# EAGLE board CoffeeHeater (EAGLE 9.2.0)
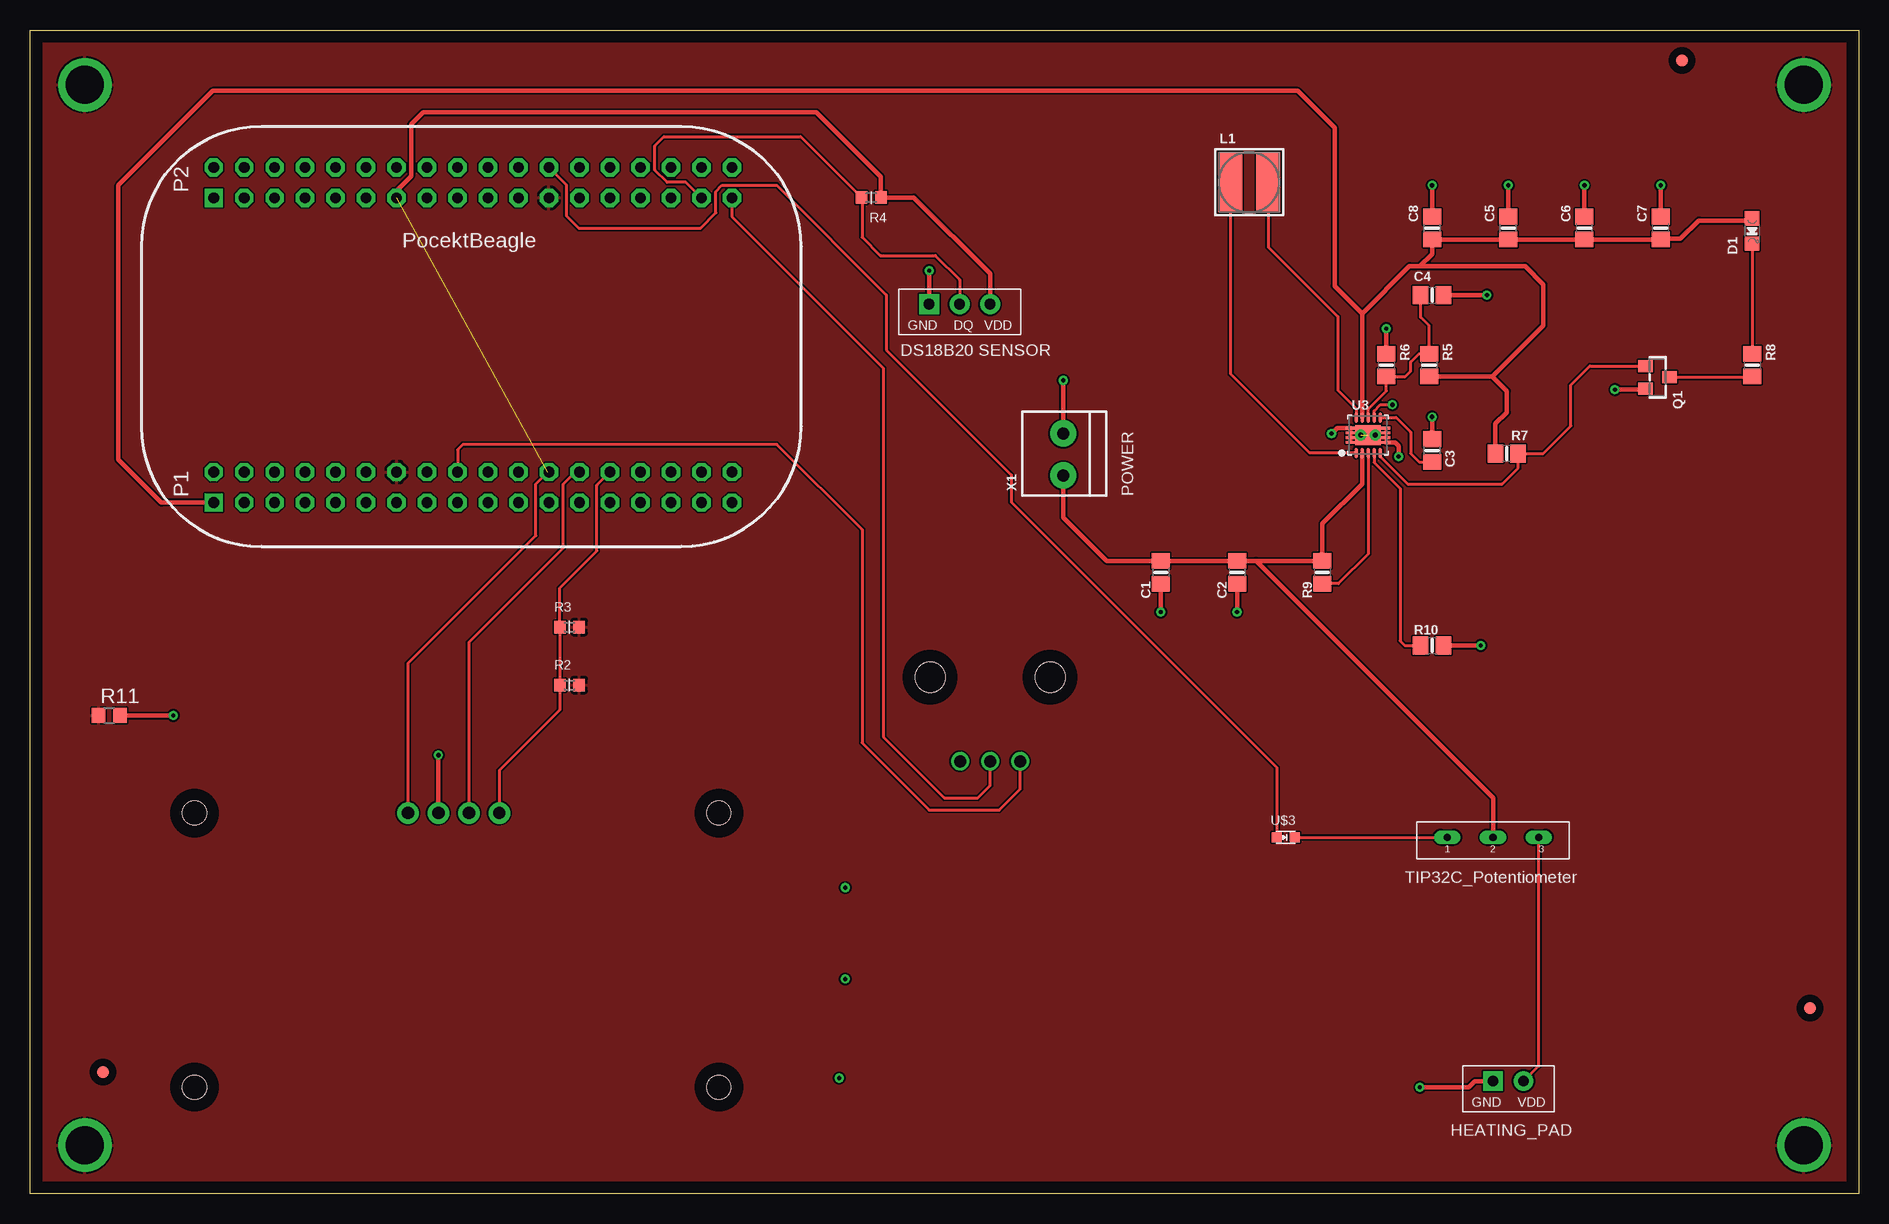
[diagram p0: board, top side]
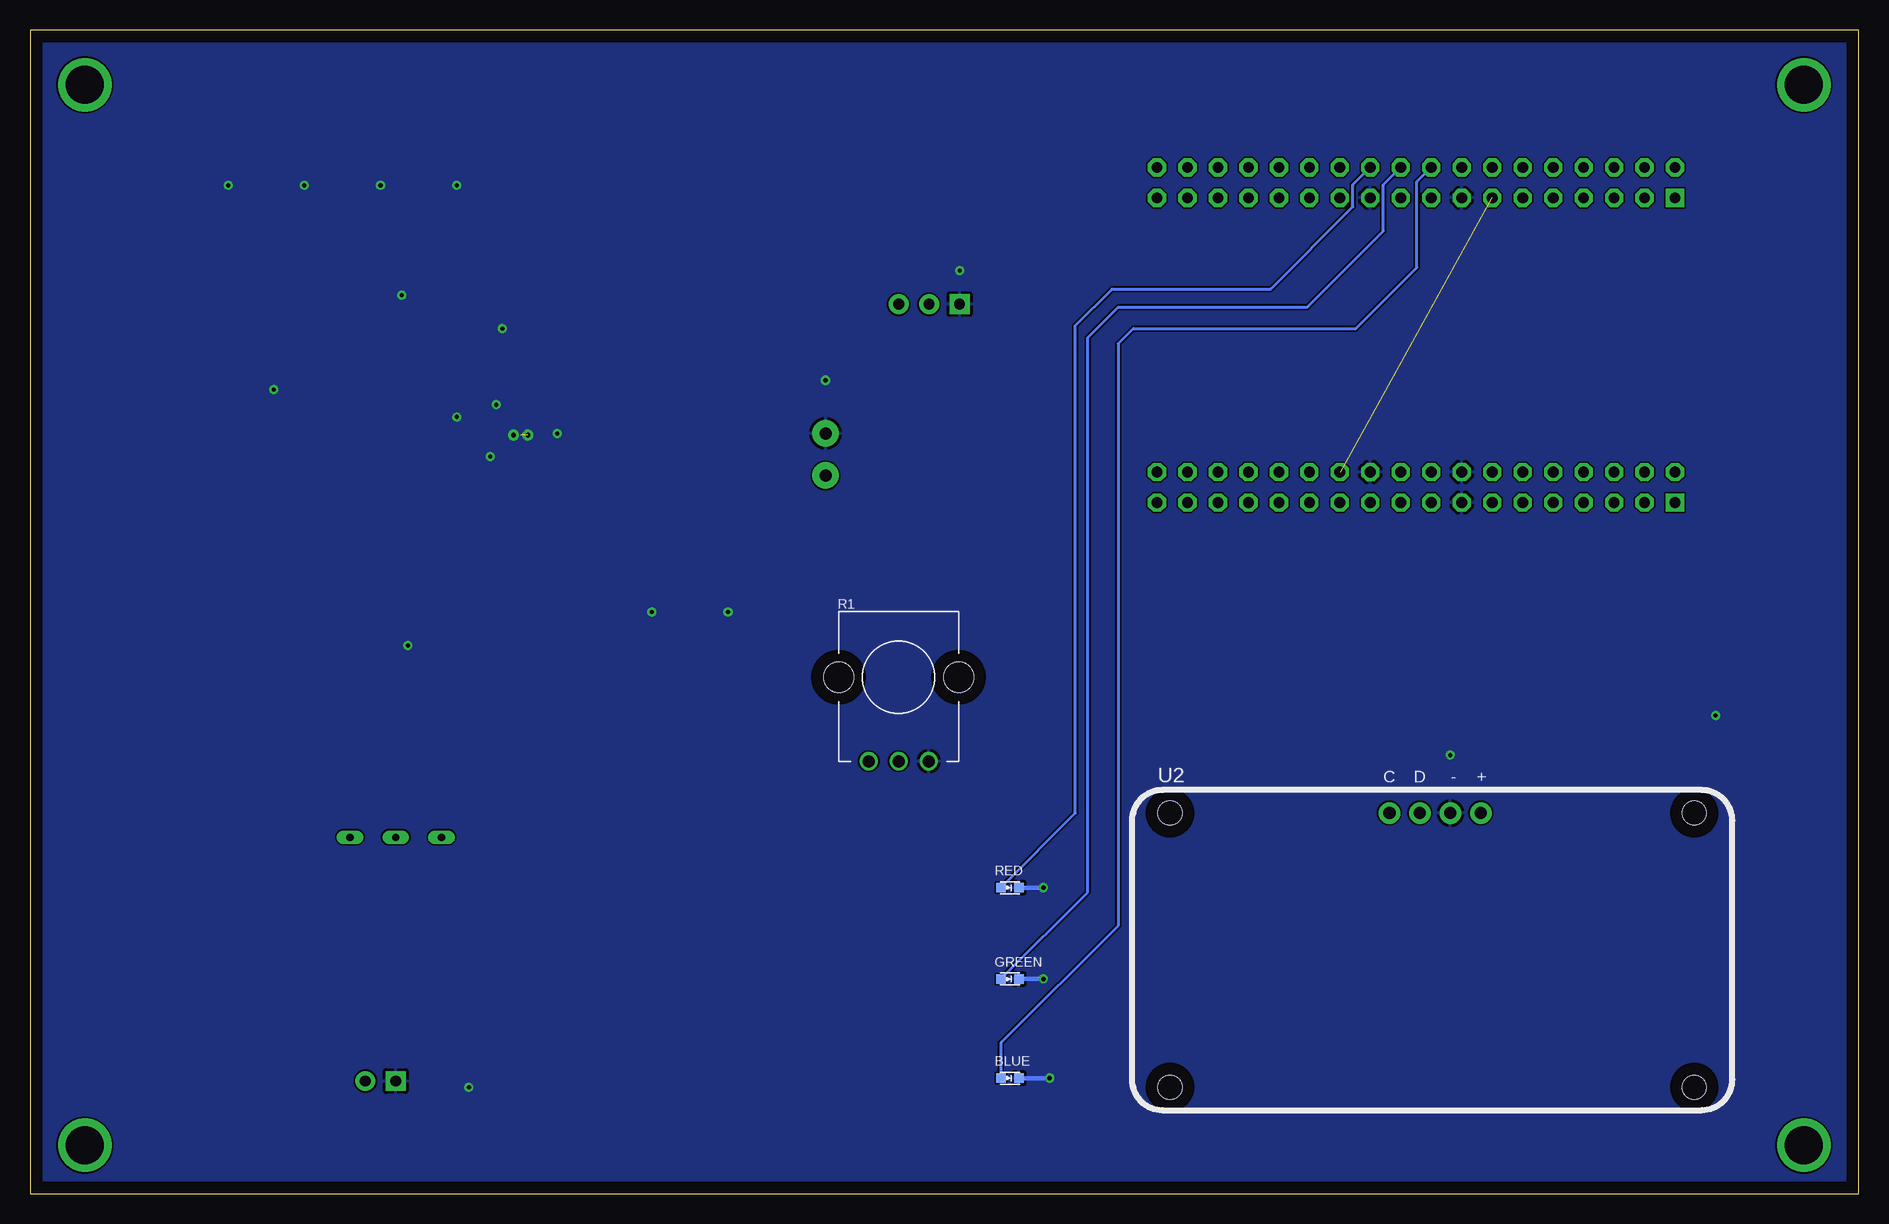
[diagram p1: board, bottom side, seen from below]

Size 152.4 x 97.03 mm. Coordinates in mm from the lower left corner, seen from the top.
Outline: 0,97.03 152.4,97.03 152.4,0 0,0 0,97.03
Copper layers (1*16): Top 0.035mm / dielectric 1.5mm / Bottom 0.035mm
Design rules "default *": minimum track width 10mil, minimum drill 0.35mm, track to track 6mil, track to pad 6mil, pad to pad 6mil, via to via 6mil, smd to smd 6mil, copper to edge 40mil, drill to drill 6mil, minimum pad ring 10mil, minimum via ring 8mil, stop-mask expansion 4mil, vias tented up to drill 0mil, thermal gap 10mil

## Footprints (pad centres in the part's own frame; a part is rotated, then mirrored left to right if it is on the bottom)
EIA-STD = smd 0.8 x 0.8: P$1 -0.75,0; P$2 0.75,0
0805-NO = smd 1.3 x 1.5: 1 -0.95,0; 2 0.95,0
CHIPLED_0805_NOOUTLINE = smd 1.2 x 1.2: A 0,-1.05; C 0,1.05
FIDUCIAL_40MIL = smd 1.016 x 1.016: P$1 0,0
INDUCTOR_5X5MM_TDK_VLC5045 = smd 2 x 5: P$1 -1.6,0; P$2 1.6,0
MOUNTING_HOLE = drill 3.175 pad 4.445: P$1 0,0
SOT23-WIDE = smd 1 x 1.2: 1 -0.95,-1; 2 0.95,-1; 3 0,1
POT-PO90S = drill 1: CCW -2.5,0; CW 2.5,0; S 0,0 | hole 2.5: -5,7; 5,7
R0603 = smd 0.95 x 1.031: 1 -0.8,0; 2 0.8,0
R0805 = smd 1.143 x 1.27: 1 -0.889,0; 2 0.889,0
POCKETBEAGLE = drill 0.889 pad 1.524 square: 1 5.91,3.53; 37 5.91,28.93 | drill 0.889 pad 1.524 octagon: 2 5.91,6.07; 3 8.45,3.53; 4 8.45,6.07; 5 10.99,3.53; 6 10.99,6.07; 7 13.53,3.53; 8 13.53,6.07; 9 16.07,3.53; 10 16.07,6.07; 11 18.61,3.53; 12 18.61,6.07; 13 21.15,3.53; 14 21.15,6.07; 15 23.69,3.53; 16 23.69,6.07; 17 26.23,3.53; 18 26.23,6.07; 19 28.77,3.53; 20 28.77,6.07; 21 31.31,3.53; 22 31.31,6.07; 23 33.85,3.53; 24 33.85,6.07; 25 36.39,3.53; 26 36.39,6.07; 27 38.93,3.53; 28 38.93,6.07; 29 41.47,3.53; 30 41.47,6.07; 31 44.01,3.53; 32 44.01,6.07; 33 46.55,3.53; 34 46.55,6.07; 35 49.09,3.53; 36 49.09,6.07; 38 5.91,31.47; 39 8.45,28.93; 40 8.45,31.47; 41 10.99,28.93; 42 10.99,31.47; 43 13.53,28.93; 44 13.53,31.47; 45 16.07,28.93; 46 16.07,31.47; 47 18.61,28.93; 48 18.61,31.47; 49 21.15,28.93; 50 21.15,31.47; 51 23.69,28.93; 52 23.69,31.47; 53 26.23,28.93; 54 26.23,31.47; 55 28.77,28.93; 56 28.77,31.47; 57 31.31,28.93; 58 31.31,31.47; 59 33.85,28.93; 60 33.85,31.47; 61 36.39,28.93; 62 36.39,31.47; 63 38.93,28.93; 64 38.93,31.47; 65 41.47,28.93; 66 41.47,31.47; 67 44.01,28.93; 68 44.01,31.47; 69 46.55,28.93; 70 46.55,31.47; 71 49.09,28.93; 72 49.09,31.47
0.56_HEX_BACKPACK = drill 1.016 pad 1.778: GND 1.524,11.43; SCL -3.556,11.43; SDA -1.016,11.43; VCC 4.064,11.43 | hole 2: -21.844,-11.43; 21.844,-11.43; -21.844,11.43; 21.844,11.43
PWSON-N10 = smd 0.28 x 0.85: 1 -1,-1.475; 2 -0.5,-1.475; 3 0,-1.475; 4 0.5,-1.475; 5 1,-1.475; 6 1,1.475; 7 0.5,1.475; 8 0,1.475; 9 -0.5,1.475; 10 -1,1.475 | smd 2.15 x 1.66: THERMAL@1 0,0 | drill 0.4 pad 0.6: THERMAL@5 -0.6,0; THERMAL@6 0.6,0 | smd 0.8 x 0.23: THERMAL@7 1.46,0.6; THERMAL@8 1.46,0.2; THERMAL@9 1.46,-0.2; THERMAL@10 1.46,-0.6; THERMAL@11 -1.46,-0.6; THERMAL@12 -1.46,-0.2; THERMAL@13 -1.46,0.2; THERMAL@14 -1.46,0.6
DS18B20_TEMP_SENSOR = drill 0.889 pad 1.651: DQ 0,0; VDD 2.54,0 | drill 0.889 pad 1.651 square: GND -2.54,0
TIP32C_TRANSISTOR = drill 0.6 long: B -3.81,0; C 0,0; E 3.81,0
DIODE = smd 0.8 x 0.8: IN -0.75,0; OUT 0.75,0
HEATING_PAD = drill 0.889 pad 1.651 square: GND -2.54,0 | drill 0.889 pad 1.651: VDD 0,0
TERMBLOCK_1X2-3.5MM = drill 1 pad 2.184: 1 1.8,0; 2 -1.7,0

## Placement (x,y rotation side)
BLUE  LED  [EIA-STD]  70.74,9.65 0 bottom
C1  10uF/16V X5R  [0805-NO]  94.23,51.82 270 top
C2  10uF/16V X5R  [0805-NO]  100.58,51.82 270 top
C3  0.1uF  [0805-NO]  116.84,61.98 90 top
C4  10pF  [0805-NO]  116.84,74.93 0 top
C5  22uF/10V X5R  [0805-NO]  123.19,80.52 90 top
C6  22uF/10V X5R  [0805-NO]  129.54,80.52 90 top
C7  22uF/10V X5R  [0805-NO]  135.89,80.52 90 top
C8  1uF/10V X5R  [0805-NO]  116.84,80.52 90 top
D1  GREEN  [CHIPLED_0805_NOOUTLINE]  143.51,80.26 180 top
FUD1  FIDUCIAL  [FIDUCIAL_40MIL]  6.1,10.16 0 top
FUD2  FIDUCIAL  [FIDUCIAL_40MIL]  137.67,94.49 0 top
FUD3  FIDUCIAL  [FIDUCIAL_40MIL]  148.34,15.49 0 top
GREEN  LED  [EIA-STD]  70.74,17.91 0 bottom
L1  NRS5030T1R0NMGJ  [INDUCTOR_5X5MM_TDK_VLC5045]  101.6,84.33 0 top
MGT1  MOUNTING_HOLE  [MOUNTING_HOLE]  4.57,4.06 0 top
MGT2  MOUNTING_HOLE  [MOUNTING_HOLE]  4.57,92.46 0 top
MGT3  MOUNTING_HOLE  [MOUNTING_HOLE]  147.83,4.06 0 top
MGT4  MOUNTING_HOLE  [MOUNTING_HOLE]  147.83,92.46 0 top
Q1  BSS138  [SOT23-WIDE]  135.64,68.07 270 top
R1  POTENTIOMETER  [POT-PO90S]  80.01,36.07 0 bottom
R2  2.2k  [R0603]  44.96,42.42 0 top
R3  2.2k  [R0603]  44.96,47.24 0 top
R4  2.2k  [R0603]  70.1,83.06 180 top
R5  1M  [0805-NO]  116.59,69.09 270 top
R6  105K  [0805-NO]  113.03,69.09 270 top
R7  1M  [0805-NO]  123.06,61.72 180 top
R8  1K  [0805-NO]  143.51,69.09 270 top
R9  105K  [0805-NO]  107.7,51.82 270 top
R10  105K  [0805-NO]  116.84,45.72 0 top
R11  0.1 Ohm  [R0805]  6.6,39.88 0 top
RED  LED  [EIA-STD]  70.74,25.53 0 bottom
U1  POCKETBEAGLE  [POCKETBEAGLE]  9.4,54.1 0 top
U2  0.56_HEX_BACKPACK  [0.56_HEX_BACKPACK]  35.56,20.32 0 bottom
U3  TPS63060  [PWSON-N10]  111.51,63.25 0 top
U$1  DS18B20_TEMP_SENSOR  [DS18B20_TEMP_SENSOR]  77.47,74.17 0 top
U$2  TIP32C_TRANSISTOR  [TIP32C_TRANSISTOR]  121.92,29.72 0 top
U$3  DIODE  [DIODE]  104.65,29.72 0 top
U$4  HEATING_PAD  [HEATING_PAD]  124.46,9.4 0 top
X1  [TERMBLOCK_1X2-3.5MM]  86.11,61.59 90 top

## Library data of the parts
BLUE GREEN R1-R4 RED U1 U2 = ENGI301
C1-C8 D1 L1 Q1 R5-R10 U3 X1 = microbuilder
FUD1-FUD3 MGT1-MGT4 R11 = Whac-a-mole
U$1-U$4 = CoffeeHeater

## Nets
5.0V: C5.1 C6.1 C7.1 C8.1 D1.A R5.2 R7.2 U1.1 U3.9
12V_VIN: C1.1 C2.1 R9.1 U3.2 U$2.C X1.2
BASE: U$2.B U$3.OUT
BAT.VIN: U1.50
CGND: MGT1.P$1 MGT2.P$1 MGT3.P$1 MGT4.P$1 R11.1
ENABLE: R9.2 U3.3
GND: BLUE.P$2 C1.2 C2.2 C3.2 C4.2 C5.2 C6.2 C7.2 C8.2 GREEN.P$2 Q1.2 R1.CW R6.1 R10.2 R11.2 RED.P$2 U1.15 U1.16 U1.22 U1.51 U1.57 U2.GND U3.7 U3.THERMAL@1 U3.THERMAL@5 U3.THERMAL@6 U3.THERMAL@7 U3.THERMAL@8 U3.THERMAL@9 U3.THERMAL@10 U3.THERMAL@11 U3.THERMAL@12 U3.THERMAL@13 U3.THERMAL@14 U$1.GND U$4.GND X1.1
HEAT_CONTROL: U1.60 U$3.IN
I2C_SCL: R2.1 R3.1 U1.28 U2.SCL
I2C_SDA: U1.26 U2.SDA
N$1: U$2.E U$4.VDD
N$2: R1.CCW U1.18
N$3: R1.S U1.71
N$6: L1.P$1 U3.1
N$7: L1.P$2 U3.10
N$8: C3.1 U3.6
N$9: C4.1 R5.1 R6.2 U3.8
N$10: D1.C R8.1
N$11: Q1.3 R8.2
PG: Q1.1 R7.1 U3.5
PS: R10.1 U3.4
START_0: BLUE.P$1 U1.54
START_1: GREEN.P$1 U1.56
START_2: RED.P$1 U1.58
TEMP: R4.2 U1.69 U$1.DQ
VDD_3P3V: R2.2 R3.2 U1.14 U1.59
VDD_5V: R4.1 U1.24 U1.49 U2.VCC U$1.VDD

## Tracks (layer width: path | path; a pad name or v marks a point on that pad's centre or on a via)
5.0V
  Top 0.254: C7.1 135.95,79.63 | 143.35,81.15 D1.A
  Top 0.381: U1.1 10.95,57.63 7.37,61.21 7.37,84.07 15.24,91.95 105.66,91.95 108.71,88.9 108.71,75.69 111.01,73.4 | 111.01,73.4 U3.9 | 111.01,73.4 114.95,77.34 115.82,77.34 | 115.82,77.34 116.84,78.36 C8.1 C5.1 C6.1 C7.1 | 135.95,79.63 137.54,79.63 139.06,81.15 143.35,81.15 | 121.86,68.14 R5.2 | 121.86,68.14 126.11,72.39 126.11,75.82 124.59,77.34 115.82,77.34 | R7.2 122.11,64.2 123.06,65.15 123.06,66.93 121.86,68.14
12V_VIN
  Top 0.381: X1.2 86.11,56.39 89.73,52.77 C1.1 C2.1 102.17,52.77 | 102.17,52.77 R9.1 107.7,55.88 111.01,59.19 U3.2 | U$2.C 121.92,33.02 102.17,52.77
BASE
  Top 0.254: U$3.OUT U$2.B
CGND
  pour Top: 0,88.9 6.1,88.9 11.68,94.49 141.22,94.49 148.34,87.38 148.34,10.16 140.97,2.79 12.19,2.79 6.1,8.89 6.1,44.45 0,44.45 0,0 152.4,0 152.4,97.03 0,97.03
ENABLE
  Top 0.254: R9.2 109.03,50.87 111.51,53.34 U3.3
GND  (via drill 0.35)  (1 unrouted)
  Top 0.254: Q1.2 134.57,67.06 | U3.THERMAL@14 U3.THERMAL@13 U3.THERMAL@12 U3.THERMAL@11 | U3.THERMAL@7 U3.THERMAL@8 U3.THERMAL@9 U3.THERMAL@10 | U3.7 112.01,65.27 112.52,65.79 v113.54,65.79
  Top 0.381: v34.04,36.58 U2.GND | C8.2 v116.84,84.07 | C5.2 v123.19,84.07 | C6.2 v129.54,84.07 | C7.2 v135.89,84.07 | 134.57,67.06 v132.08,67.06 | v121.41,74.93 C4.2 | R6.1 v113.03,72.14 | v116.84,64.77 C3.2 | R10.2 v120.9,45.72 | U$4.GND 120.4,9.4 119.89,8.89 v115.82,8.89 | C1.2 v94.23,48.51 | C2.2 v100.58,48.51 | X1.1 v86.11,67.82 | U$1.GND v74.93,76.96 | U3.THERMAL@14 108.93,63.85 v108.46,63.37 | U3.THERMAL@10 113.76,62.65 114.05,62.36 v114.05,61.47 | R11.2 v11.94,39.88
  Bottom 0.381: RED.P$2 v67.94,25.53 | GREEN.P$2 v67.94,17.91 | BLUE.P$2 v67.44,9.65
  pour Bottom: -2.54,99.57 -2.54,-7.11 154.94,-7.11 154.94,99.57
HEAT_CONTROL
  Top 0.254: U1.60 44.7,84.12 44.7,81.53 45.72,80.52 55.88,80.52 57.15,81.79 57.15,83.57 57.66,84.07 62.23,84.07 71.37,74.93 71.37,70.36 81.79,59.94 81.79,57.66 103.9,35.55 U$3.IN
I2C_SCL
  Top 0.254: U2.SCL 39.12,35.31 44.16,40.35 R2.1 R3.1 44.16,50.51 47.24,53.59 47.24,59.09 U1.28
I2C_SDA
  Top 0.254: U2.SDA 36.58,45.97 44.45,53.85 44.45,59.18 45.44,60.17 U1.26
N$1
  Top 0.254: U$4.VDD 125.73,10.67 U$2.E
N$2
  Top 0.254: R1.CCW 82.51,33.74 80.77,32 74.93,32 69.34,37.59 69.34,55.37 62.23,62.48 36.07,62.48 35.63,62.04 U1.18
N$3
  Top 0.254: U1.71 58.49,81.47 71.12,68.83 71.12,38.1 76.2,33.02 78.99,33.02 80.01,34.04 R1.S
N$6
  Top 0.254: U3.1 106.63,61.77 100.08,68.33 100.08,84.25 L1.P$1
N$7
  Top 0.254: L1.P$2 103.2,78.92 108.98,73.14 108.98,67.01 110.51,65.48 U3.10
N$8
  Top 0.254: U3.6 113.84,64.72 115.06,63.5 115.06,61.72 115.76,61.03 C3.1
N$9
  Top 0.254: U3.8 111.51,65.41 113.03,66.93 R6.2 114.62,68.14 115.06,68.58 115.06,69.34 115.76,70.04 R5.1 116.59,72.39 115.89,73.09 C4.1
N$10
  Top 0.254: D1.C R8.1
N$11
  Top 0.254: Q1.3 143.44,68.07 R8.2
PG
  Top 0.254: U3.5 112.51,61.48 114.81,59.18 122.68,59.18 124.02,60.52 R7.1 126.11,61.72 128.4,64.01 128.4,67.44 129.98,69.02 Q1.1
PS
  Top 0.254: U3.4 112.01,60.97 114.17,58.8 114.17,46.1 114.55,45.72 R10.1
START_0
  Bottom 0.254: BLUE.P$1 71.49,12.59 61.72,22.35 61.72,70.87 60.45,72.14 41.91,72.14 36.83,77.22 36.83,84.37 U1.54
START_1
  Bottom 0.254: GREEN.P$1 64.26,25.13 64.26,71.37 61.72,73.91 45.97,73.91 39.62,80.26 39.62,84.12 U1.56
START_2
  Bottom 0.254: RED.P$1 65.28,31.74 65.28,72.39 62.23,75.44 49.02,75.44 42.16,82.3 42.16,84.12 U1.58
TEMP
  Top 0.152: 68.03,84.33 68.05,84.31 | R4.2 69.34,83.02
  Top 0.254: 68.05,84.31 R4.2 | 69.34,83.02 69.34,79.76 70.87,78.23 75.44,78.23 77.47,76.2 U$1.DQ | U1.69 54.65,84.33 53.09,84.33 52.07,85.34 52.07,87.38 52.83,88.14 64.22,88.14 68.03,84.33
VDD_3P3V
  pour Top: -1.27,98.3 -1.27,-5.84 153.67,-5.84 153.67,98.3
VDD_5V  (1 unrouted)
  Top 0.254: U2.VCC 31.5,44.2 42.16,54.86 42.16,59.18 43.15,60.17 U1.24
  Top 0.381: U1.49 30.55,83.63 31.75,84.84 31.75,89.15 32.77,90.17 65.53,90.17 70.9,84.8 R4.1 73.66,83.06 80.01,76.71 U$1.VDD

## Text on the board
tPlace: DS18B20 SENSOR | POWER | TIP32C_Potentiometer | HEATING_PAD